# Altium PCB ASH067476_智信同德_PCB源文件.PcbDoc
Units mil, origin at the board's own origin, x right, y up, seen from the top; angles counter-clockwise.
Board outline 745 x 520 mil, 2 copper layers (Top Layer, Bottom Layer); 2 components, 7 nets, 16 pads, 0 vias.
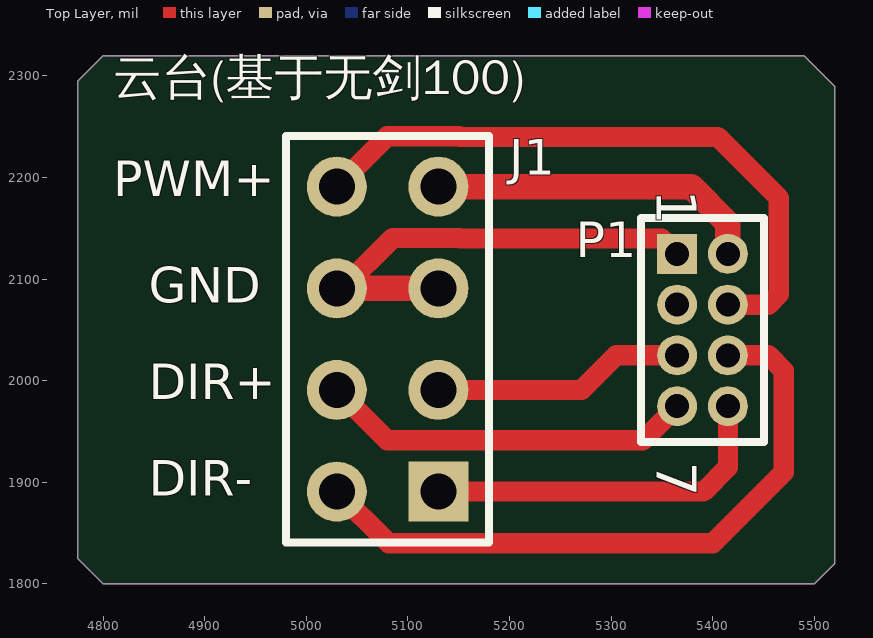
[diagram p0: Top Layer view]
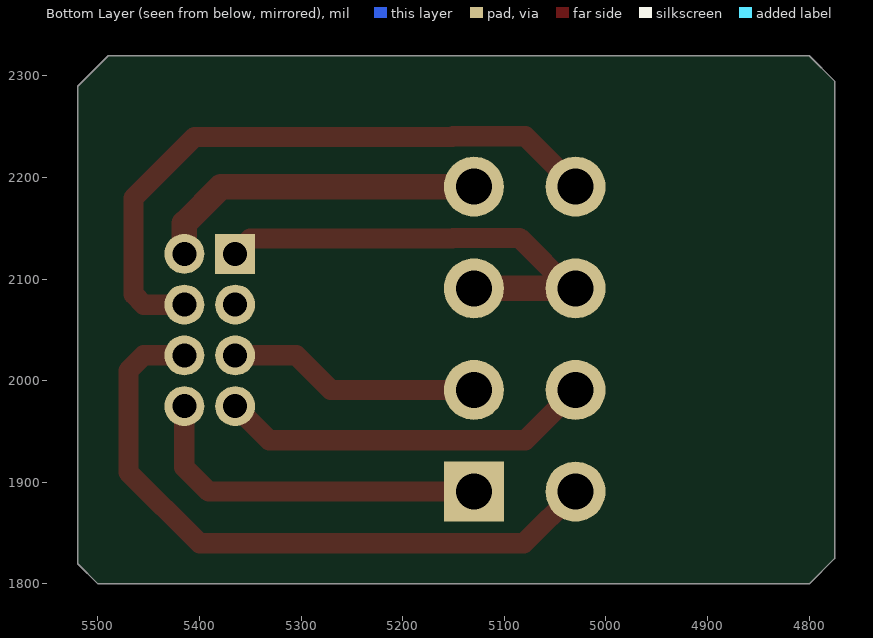
[diagram p1: Bottom Layer view, seen from below]

## Layer stack, top to bottom
Top Solder: solder mask 0.4, Solder Resist, Dk 3.5
Top Layer: signal copper 1.4
Dielectric 1: dielectric 12.6, FR-4, Dk 4.8
Bottom Layer: signal copper 1.4
Bottom Solder: solder mask 0.4, Solder Resist, Dk 3.5

## Board outline
4775,1825 4800,1800 5500,1800 5520,1820 5520,2290 5490,2320 4800,2320 4775,2295

## Design rules (kind name [scope] priority, off if disabled: settings)
Clearance [All] p1: gap=10 ignorepadtopadclearanceinfootprint=FALSE except(0: Arc-Hole Track-Hole SMDPad-Hole THPad-Hole Via-Hole Fill-Hole Poly-Hole Region-Hole Text-Hole)
PolygonConnect [All] p1: connectstyle=Relief reliefconductorwidth=10 reliefentries=4 polygonreliefangle="90 Angle" airgapwidth=10
RoutingVias [All] p1: holewidth=28 width=50 viastyle="Through Hole" minholewidth=28 minwidth=50 maxholewidth=28 maxwidth=50
SolderMaskExpansion [All] p1: expansion=4
Width [All] p1: maxlimit=50 minlimit=10 preferedwidth=10 minimp=50.000000 maximp=50.000000 favimp=50.000000
30 further rules are at their usual default settings.

## Components (designator, comment, footprint, x,y, rotation, side; value= is the part's Value field where it differs from the comment)
J1 "Pin HDR2X4" "Pin HDR2X4/2.54mm-S" 5130,1891.01 r90 top
P1 "MHDR2X4" MHDR2X4 5365,2125 r270 top

## Footprints (in the part's own frame and the unit in brackets; to place one, negate y for a bottom-side part, rotate by r counter-clockwise, add the part's x,y. Pads: shape width x height; smd on the part's side, far side on the other; paste and mask are expansions set on the pad)
MHDR2X4 [mm] "Connector; Header; 4x2 Position"
  rect 1x1 hole 0.6: 1(0,0)
  round 1 hole 0.6: 2(0,1.27) 3(1.27,0) 4(1.27,1.27) 5(2.54,0) 6(2.54,1.27) 7(3.81,0) 8(3.81,1.27)
  silkscreen extent -0.9,-0.9 4.71,2.17
"Pin HDR2X4/2.54mm-S" [mm] "Connector; Header; 4x2 Position"
  rect 1.5x1.5 hole 0.9: 1(0,0)
  round 1.5 hole 0.9: 2(0,2.54) 3(2.54,0) 4(2.54,2.54) 5(5.08,0) 6(5.08,2.54) 7(7.62,0) 8(7.62,2.54)
  silkscreen extent -1.27,-1.27 8.89,3.81, body extent -1.27,-1.27 8.89,3.81, height 7.58

## Part data
P1: "Header, 4-Pin, Dual row", LatestRevisionDate=17-Jul-2002, LatestRevisionNote="Re-released for DXP Platform.", Publisher="Altium Limited"

## Nets (pads, with @x,y where several pads share a name; then routed paths per layer and width w, separated by ;. In a path a pad name is that pad's centre, name@x,y a point inside that pad or via, vN(x,y) a via of type N, cw(c..) or ccw(c..) an arc to the next point about the centre after c; other vN are vias at no path point)
NetJ1_1: J1.1 P1.8 | length 354.9
  Top Layer w20: J1.1 5391.01,1891.01 5415,1915 P1.8
NetJ1_2: J1.2 P1.6 | length 651.3
  Top Layer w20: J1.2 5081.01,1840 5400,1840 5470,1910 5470,2010 5455,2025 P1.6
NetJ1_3: J1.3 P1.5 | length 249.1
  Top Layer w20: J1.3 5271.01,1991.01 5305,2025 P1.5
NetJ1_4: J1.4 P1.7 | length 369.4
  Top Layer w20: J1.4 5079.53,1941.49 5331.49,1941.49 P1.7
NetJ1_5: J1.5 J1.6 P1.1 | length 456.4
  Top Layer w20: J1.6@5035.54,2091.01 5085.07,2140.54 5150.52,2140.54 5151.06,2140 5350,2140 P1.1
  Top Layer w25: J1.6 5035.54,2091.01 J1.5
NetJ1_7: J1.7 P1.2 | length 329.9
  Top Layer w25: J1.7 5378.99,2191.01 5415,2155 P1.2
NetJ1_8: J1.8 P1.4 | length 629.7
  Top Layer w20: J1.8 5079.53,2240.54 5150.52,2240.54 5151.06,2240 5405,2240 5465,2180 5465,2085 5455,2075 P1.4
pads on no net: P1.3

## Keep-outs
Top Layer:
  the board outline again, w0.1

## Silkscreen, mask and mechanical layers (free items; w line width, h text height)
Top Overlay:
  text "云台(基于无剑100)" at 4810,2270 h60
  text "PWM+" at 4810,2170 h60
  text "GND" at 4845,2065 h60
  text "DIR+" at 4845,1970 h60
  text "DIR-" at 4845,1875 h60

## Text inside footprints (layer, text, board x,y; h text height)
P1: Top Overlay "1" at 5345,2187.99 h39.37 r270; Top Overlay "7" at 5345,1920.28 h39.37 r270